# EAGLE board panel (EAGLE 9.6.2)
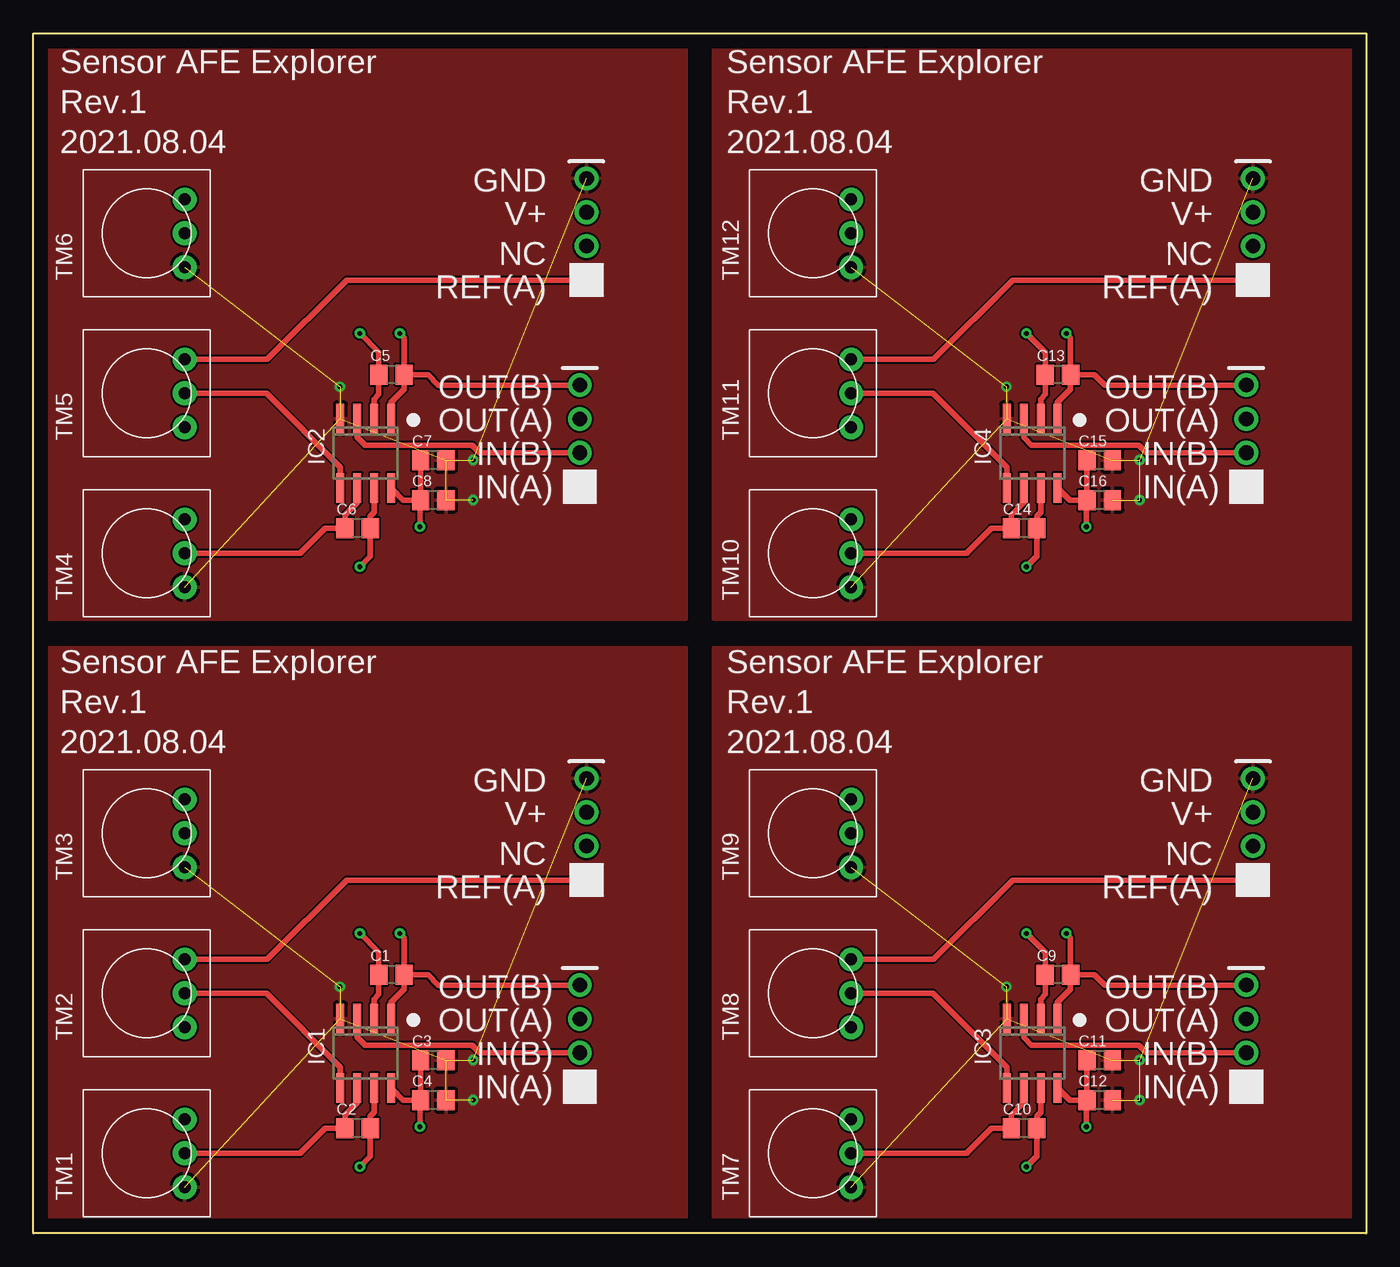
[diagram p0: board, top side]
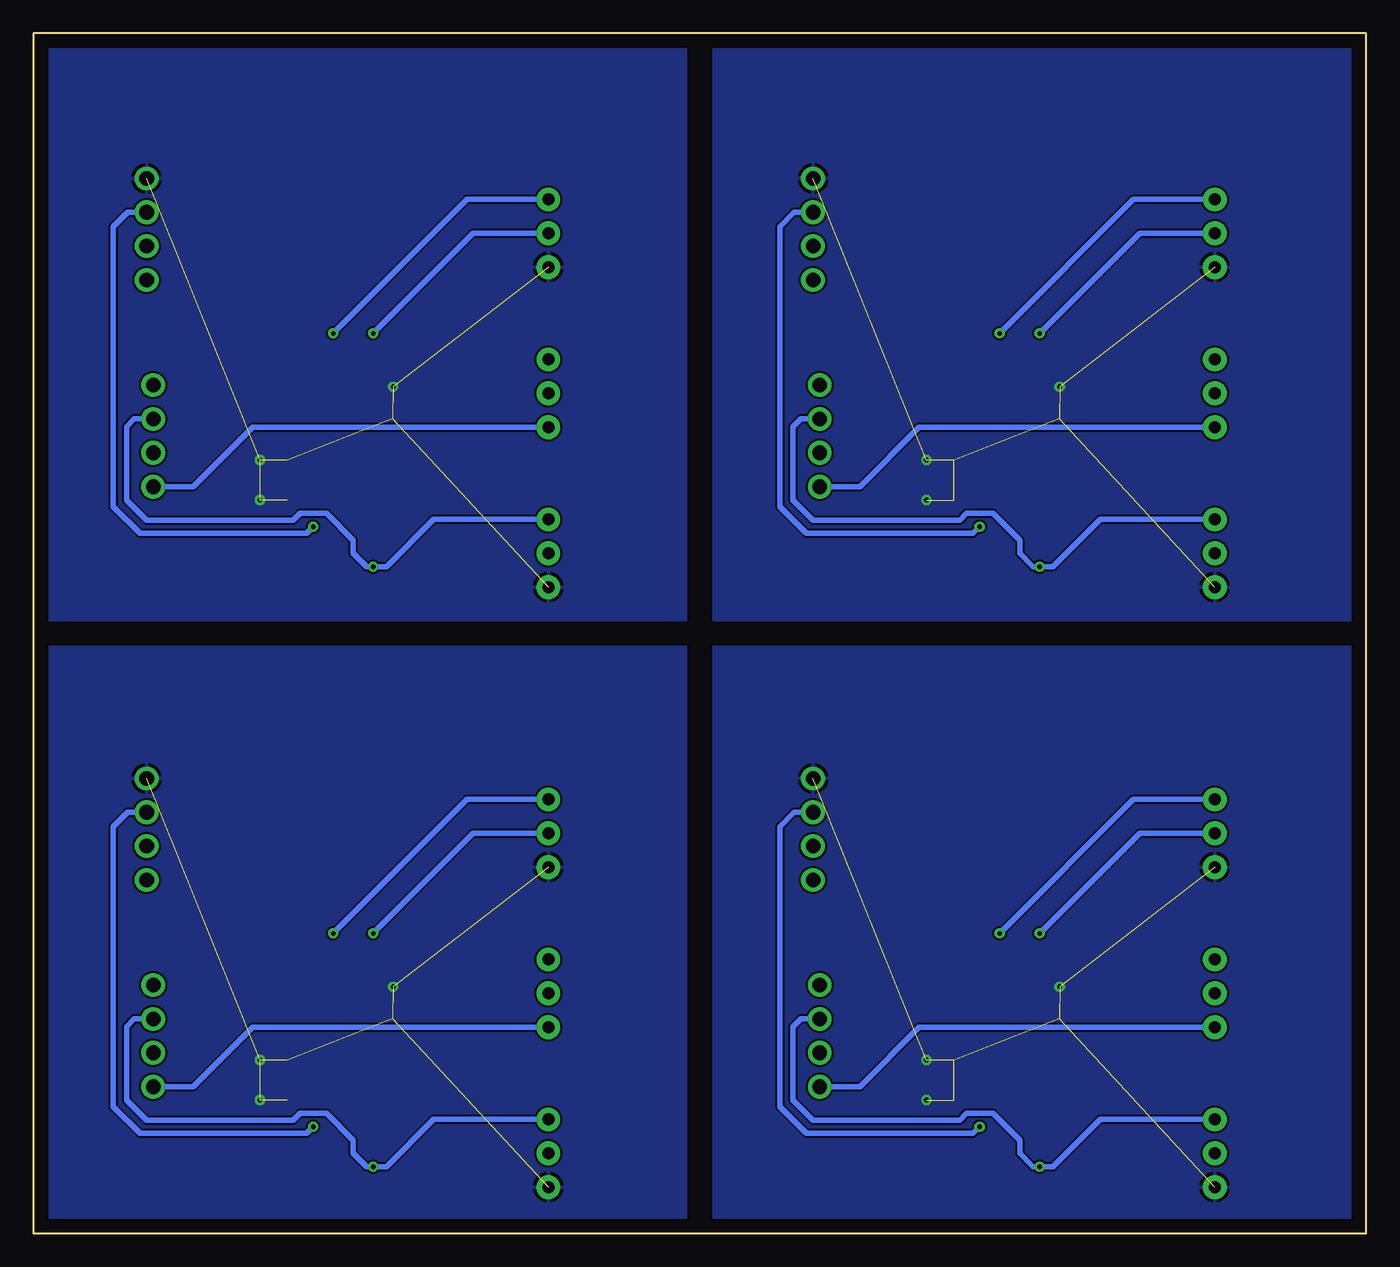
[diagram p1: board, bottom side, seen from below]

Size 100 x 90 mm. Coordinates in mm from the lower left corner, seen from the top.
Outline: 0,0 0,90 100,90 100,0 0,0
Copper layers (1*16): Top 0.035mm / dielectric 1.5mm / Bottom 0.035mm
Design rules "default": minimum track width 6mil, minimum drill 0.35mm, track to track 6mil, track to pad 6mil, pad to pad 6mil, via to via 6mil, smd to smd 6mil, copper to edge 40mil, drill to drill 6mil, minimum pad ring 10mil, minimum via ring 8mil, stop-mask expansion 4mil, vias tented up to drill 0mil, thermal gap 10mil

## Footprints (pad centres in the part's own frame; a part is rotated, then mirrored left to right if it is on the bottom)
C0805 = smd 1.3 x 1.5: 1 -0.95,0; 2 0.95,0
SO8 = smd 0.6 x 2.2: 1 -1.905,-2.6; 2 -0.635,-2.6; 3 0.635,-2.6; 4 1.905,-2.6; 5 1.905,2.6; 6 0.635,2.6; 7 -0.635,2.6; 8 -1.905,2.6
TRIM-3386 = drill 0.9 pad 1.778: 1 -2.54,-2.857; 2 0,-2.857; 3 2.54,-2.857
PCB_4 = drill 1.1 pad 1.778: P$1 0,0; P$2 0,-2.54; P$3 0,-5.08; P$4 0,-7.62

## Placement (x,y rotation side)
C1  [C0805]  26.87,19.4 0 top
C2  [C0805]  24.33,7.89 0 top
C3  [C0805]  30,13 0 top
C4  [C0805]  30,10 0 top
C5  [C0805]  26.87,64.4 0 top
C6  [C0805]  24.33,52.89 0 top
C7  [C0805]  30,58 0 top
C8  [C0805]  30,55 0 top
C9  [C0805]  76.87,19.4 0 top
C10  [C0805]  74.33,7.89 0 top
C11  [C0805]  80,13 0 top
C12  [C0805]  80,10 0 top
C13  [C0805]  76.87,64.4 0 top
C14  [C0805]  74.33,52.89 0 top
C15  [C0805]  80,58 0 top
C16  [C0805]  80,55 0 top
IC1  AD8542R  [SO8]  24.94,13.51 180 top
IC2  AD8542R  [SO8]  24.94,58.51 180 top
IC3  AD8542R  [SO8]  74.94,13.51 180 top
IC4  AD8542R  [SO8]  74.94,58.51 180 top
TM1  [TRIM-3386]  8.5,6 90 top
TM2  [TRIM-3386]  8.5,18 90 top
TM3  [TRIM-3386]  8.5,30 90 top
TM4  [TRIM-3386]  8.5,51 90 top
TM5  [TRIM-3386]  8.5,63 90 top
TM6  [TRIM-3386]  8.5,75 90 top
TM7  [TRIM-3386]  58.5,6 90 top
TM8  [TRIM-3386]  58.5,18 90 top
TM9  [TRIM-3386]  58.5,30 90 top
TM10  [TRIM-3386]  58.5,51 90 top
TM11  [TRIM-3386]  58.5,63 90 top
TM12  [TRIM-3386]  58.5,75 90 top
U$1  PINS_4SILK  [PCB_4]  41,11 180 top
U$2  PINS_4SILK  [PCB_4]  41.5,26.5 180 top
U$3  PINS_4SILK  [PCB_4]  41,56 180 top
U$4  PINS_4SILK  [PCB_4]  41.5,71.5 180 top
U$5  PINS_4SILK  [PCB_4]  91,11 180 top
U$6  PINS_4SILK  [PCB_4]  91.5,26.5 180 top
U$7  PINS_4SILK  [PCB_4]  91,56 180 top
U$8  PINS_4SILK  [PCB_4]  91.5,71.5 180 top

## Library data of the parts
C1-C16 TM1-TM12 U$1-U$8 = nolan-utsa
IC1-IC4 = analog-devices; MF: ALTERA CORPORATION; MPN: AD8542ARZ-REEL; OC_FARNELL: 1424150; OC_NEWARK: 59K6827

## Nets
GND: C3.2 C4.2 IC1.4 TM1.1 TM3.1 U$2.P$4
GND1: C7.2 C8.2 IC2.4 TM4.1 TM6.1 U$4.P$4
GND2: C11.2 C12.2 IC3.4 TM7.1 TM9.1 U$6.P$4
GND3: C15.2 C16.2 IC4.4 TM10.1 TM12.1 U$8.P$4
N$1: C2.1 IC1.6 TM1.2
N$2: C2.2 IC1.7 TM1.3 U$1.P$3
N$3: C1.1 IC1.2 TM3.2
N$4: C1.2 IC1.1 TM3.3 U$1.P$4
N$5: IC1.3 U$1.P$2
N$6: TM2.1 U$1.P$1
N$7: IC1.5 TM2.2
N$8: TM2.3 U$2.P$1
N$9: C6.1 IC2.6 TM4.2
N$10: C6.2 IC2.7 TM4.3 U$3.P$3
N$11: C5.1 IC2.2 TM6.2
N$12: C5.2 IC2.1 TM6.3 U$3.P$4
N$13: IC2.3 U$3.P$2
N$14: TM5.1 U$3.P$1
N$15: IC2.5 TM5.2
N$16: TM5.3 U$4.P$1
N$17: C10.1 IC3.6 TM7.2
N$18: C10.2 IC3.7 TM7.3 U$5.P$3
N$19: C9.1 IC3.2 TM9.2
N$20: C9.2 IC3.1 TM9.3 U$5.P$4
N$21: IC3.3 U$5.P$2
N$22: TM8.1 U$5.P$1
N$23: IC3.5 TM8.2
N$24: TM8.3 U$6.P$1
N$25: C14.1 IC4.6 TM10.2
N$26: C14.2 IC4.7 TM10.3 U$7.P$3
N$27: C13.1 IC4.2 TM12.2
N$28: C13.2 IC4.1 TM12.3 U$7.P$4
N$29: IC4.3 U$7.P$2
N$30: TM11.1 U$7.P$1
N$31: IC4.5 TM11.2
N$32: TM11.3 U$8.P$1
VCC: C3.1 C4.1 IC1.8 U$2.P$3
VCC1: C7.1 C8.1 IC2.8 U$4.P$3
VCC2: C11.1 C12.1 IC3.8 U$6.P$3
VCC3: C15.1 C16.1 IC4.8 U$8.P$3

## Tracks (layer width: path | path; a pad name or v marks a point on that pad's centre or on a via)
GND  (via drill 0.35)  (8 unrouted)
  other vias: 33,13 33,10 23,18.5
  pour Top: 1,1 1,44 49,44 49,1
  pour Bottom: 1,1 1,44 49,44 49,1
GND1  (via drill 0.35)  (8 unrouted)
  other vias: 33,58 33,55 23,63.5
  pour Top: 1,46 1,89 49,89 49,46
  pour Bottom: 1,46 1,89 49,89 49,46
GND2  (via drill 0.35)  (8 unrouted)
  other vias: 83,13 83,10 73,18.5
  pour Top: 51,1 51,44 99,44 99,1
  pour Bottom: 51,1 51,44 99,44 99,1
GND3  (via drill 0.35)  (8 unrouted)
  other vias: 83,58 83,55 73,63.5
  pour Top: 51,46 51,89 99,89 99,46
  pour Bottom: 51,46 51,89 99,89 99,46
N$1
  Top 0.152: C2.1 23.33,7.84
  Top 0.406: TM1.2 20,6 21.89,7.89 C2.1 23.38,8.88 24.3,9.8 IC1.6
N$2  (via drill 0.35)
  Top 0.152: 25.34,8.09 C2.2
  Top 0.406: IC1.7 25.57,9.07 25.28,8.78 C2.2 25.28,5.78 v24.5,5
  Bottom 0.406: TM1.3 19.96,8.54 23.5,5 v24.5,5 25,5 26,6 26,7 28,9 30,9 30.5,8.5 41.5,8.5 43,10 43,15.5 42.42,16.08 U$1.P$3
N$3  (via drill 0.35)
  Top 0.152: 25.91,19.3 C1.1 | 25.65,16.2 IC1.2
  Top 0.406: IC1.2 25.57,17.57 25.92,17.92 C1.1 25.92,21.08 v24.5,22.5
  Bottom 0.406: TM3.2 17,30 v24.5,22.5
N$4  (via drill 0.35)
  Top 0.152: 27.89,19.3 C1.2
  Top 0.406: IC1.1 26.84,17.34 27.82,18.32 C1.2 | v27.5,22.5 27.82,22.18 C1.2 | C1.2 29.6,19.4 30.38,18.62 U$1.P$4
  Bottom 0.406: TM3.3 17.46,32.54 v27.5,22.5
N$5
  Top 0.152: 24.43,16.05 IC1.3
  Top 0.406: U$1.P$2 33.5,13.54 32.93,14.11 24.89,14.11 24.3,14.7 IC1.3
N$6
  Bottom 0.406: TM2.1 33.54,15.46 38,11 U$1.P$1
N$7
  Top 0.406: TM2.2 17.5,18 23.04,12.46 IC1.5
N$8
  Top 0.406: TM2.3 17.54,20.54 23.5,26.5 U$2.P$1
N$9
  Top 0.152: C6.1 23.33,52.84
  Top 0.406: TM4.2 20,51 21.89,52.89 C6.1 23.38,53.88 24.3,54.8 IC2.6
N$10  (via drill 0.35)
  Top 0.152: 25.34,53.09 C6.2
  Top 0.406: IC2.7 25.57,54.08 25.28,53.78 C6.2 25.28,50.78 v24.5,50
  Bottom 0.406: TM4.3 19.96,53.54 23.5,50 v24.5,50 25,50 26,51 26,52 28,54 30,54 30.5,53.5 41.5,53.5 43,55 43,60.5 42.42,61.08 U$3.P$3
N$11  (via drill 0.35)
  Top 0.152: 25.91,64.3 C5.1 | 25.65,61.2 IC2.2
  Top 0.406: IC2.2 25.57,62.58 25.92,62.92 C5.1 25.92,66.08 v24.5,67.5
  Bottom 0.406: TM6.2 17,75 v24.5,67.5
N$12  (via drill 0.35)
  Top 0.152: 27.89,64.3 C5.2
  Top 0.406: IC2.1 26.84,62.34 27.82,63.32 C5.2 | v27.5,67.5 27.82,67.18 C5.2 | C5.2 29.6,64.4 30.38,63.62 U$3.P$4
  Bottom 0.406: TM6.3 17.46,77.54 v27.5,67.5
N$13
  Top 0.152: 24.43,61.05 IC2.3
  Top 0.406: U$3.P$2 33.5,58.54 32.93,59.11 24.89,59.11 24.3,59.7 IC2.3
N$14
  Bottom 0.406: TM5.1 33.54,60.46 38,56 U$3.P$1
N$15
  Top 0.406: TM5.2 17.5,63 23.04,57.47 IC2.5
N$16
  Top 0.406: TM5.3 17.54,65.54 23.5,71.5 U$4.P$1
N$17
  Top 0.152: C10.1 73.33,7.84
  Top 0.406: TM7.2 70,6 71.89,7.89 C10.1 73.38,8.88 74.31,9.8 IC3.6
N$18  (via drill 0.35)
  Top 0.152: 75.34,8.09 C10.2
  Top 0.406: IC3.7 75.58,9.07 75.28,8.78 C10.2 75.28,5.78 v74.5,5
  Bottom 0.406: TM7.3 69.96,8.54 73.5,5 v74.5,5 75,5 76,6 76,7 78,9 80,9 80.5,8.5 91.5,8.5 93,10 93,15.5 92.42,16.08 U$5.P$3
N$19  (via drill 0.35)
  Top 0.152: 75.91,19.3 C9.1 | 75.65,16.2 IC3.2
  Top 0.406: IC3.2 75.58,17.57 75.92,17.92 C9.1 75.92,21.08 v74.5,22.5
  Bottom 0.406: TM9.2 67,30 v74.5,22.5
N$20  (via drill 0.35)
  Top 0.152: 77.89,19.3 C9.2
  Top 0.406: IC3.1 76.84,17.34 77.82,18.32 C9.2 | v77.5,22.5 77.82,22.18 C9.2 | C9.2 79.6,19.4 80.38,18.62 U$5.P$4
  Bottom 0.406: TM9.3 67.46,32.54 v77.5,22.5
N$21
  Top 0.152: 74.43,16.05 IC3.3
  Top 0.406: U$5.P$2 83.5,13.54 82.93,14.11 74.89,14.11 74.31,14.7 IC3.3
N$22
  Bottom 0.406: TM8.1 83.54,15.46 88,11 U$5.P$1
N$23
  Top 0.406: TM8.2 67.5,18 73.03,12.46 IC3.5
N$24
  Top 0.406: TM8.3 67.54,20.54 73.5,26.5 U$6.P$1
N$25
  Top 0.152: C14.1 73.33,52.84
  Top 0.406: TM10.2 70,51 71.89,52.89 C14.1 73.38,53.88 74.31,54.8 IC4.6
N$26  (via drill 0.35)
  Top 0.152: 75.34,53.09 C14.2
  Top 0.406: IC4.7 75.58,54.08 75.28,53.78 C14.2 75.28,50.78 v74.5,50
  Bottom 0.406: TM10.3 69.96,53.54 73.5,50 v74.5,50 75,50 76,51 76,52 78,54 80,54 80.5,53.5 91.5,53.5 93,55 93,60.5 92.42,61.08 U$7.P$3
N$27  (via drill 0.35)
  Top 0.152: 75.91,64.3 C13.1 | 75.65,61.2 IC4.2
  Top 0.406: IC4.2 75.58,62.58 75.92,62.92 C13.1 75.92,66.08 v74.5,67.5
  Bottom 0.406: TM12.2 67,75 v74.5,67.5
N$28  (via drill 0.35)
  Top 0.152: 77.89,64.3 C13.2
  Top 0.406: IC4.1 76.84,62.34 77.82,63.32 C13.2 | v77.5,67.5 77.82,67.18 C13.2 | C13.2 79.6,64.4 80.38,63.62 U$7.P$4
  Bottom 0.406: TM12.3 67.46,77.54 v77.5,67.5
N$29
  Top 0.152: 74.43,61.05 IC4.3
  Top 0.406: U$7.P$2 83.5,58.54 82.93,59.11 74.89,59.11 74.31,59.7 IC4.3
N$30
  Bottom 0.406: TM11.1 83.54,60.46 88,56 U$7.P$1
N$31
  Top 0.406: TM11.2 67.5,63 73.03,57.47 IC4.5
N$32
  Top 0.406: TM11.3 67.54,65.54 73.5,71.5 U$8.P$1
VCC  (via drill 0.35)
  Top 0.406: C3.1 C4.1 | IC1.8 27.75,10 C4.1 | v29,8 29,9.95 C4.1
  Bottom 0.406: U$2.P$3 42.92,31.58 44,30.5 44,9.5 42,7.5 29.5,7.5 v29,8
VCC1  (via drill 0.35)
  Top 0.406: C7.1 C8.1 | IC2.8 27.75,55 C8.1 | v29,53 29,54.95 C8.1
  Bottom 0.406: U$4.P$3 42.92,76.58 44,75.5 44,54.5 42,52.5 29.5,52.5 v29,53
VCC2  (via drill 0.35)
  Top 0.406: C11.1 C12.1 | IC3.8 77.75,10 C12.1 | v79,8 79,9.95 C12.1
  Bottom 0.406: U$6.P$3 92.92,31.58 94,30.5 94,9.5 92,7.5 79.5,7.5 v79,8
VCC3  (via drill 0.35)
  Top 0.406: C15.1 C16.1 | IC4.8 77.75,55 C16.1 | v79,53 79,54.95 C16.1
  Bottom 0.406: U$8.P$3 92.92,76.58 94,75.5 94,54.5 92,52.5 79.5,52.5 v79,53

## Text on the board
tPlace: Sensor AFE Explorer | Sensor AFE Explorer | Rev.1 | Rev.1 | 2021.08.04 | 2021.08.04 | GND | GND | V+ | V+ | NC | NC | REF(A) | REF(A) | OUT(B) | OUT(B) | OUT(A) | OUT(A) | IN(B) | IN(B) | IN(A) | IN(A) | Sensor AFE Explorer | Sensor AFE Explorer | Rev.1 | Rev.1 | 2021.08.04 | 2021.08.04 | GND | GND | V+ | V+ | NC | NC | REF(A) | REF(A) | OUT(B) | OUT(B) | OUT(A) | OUT(A) | IN(B) | IN(B) | IN(A) | IN(A)